# EAGLE board MicroMod_ATP_CarrierBoard-Panel (EAGLE 9.5.2), part 1 of 3
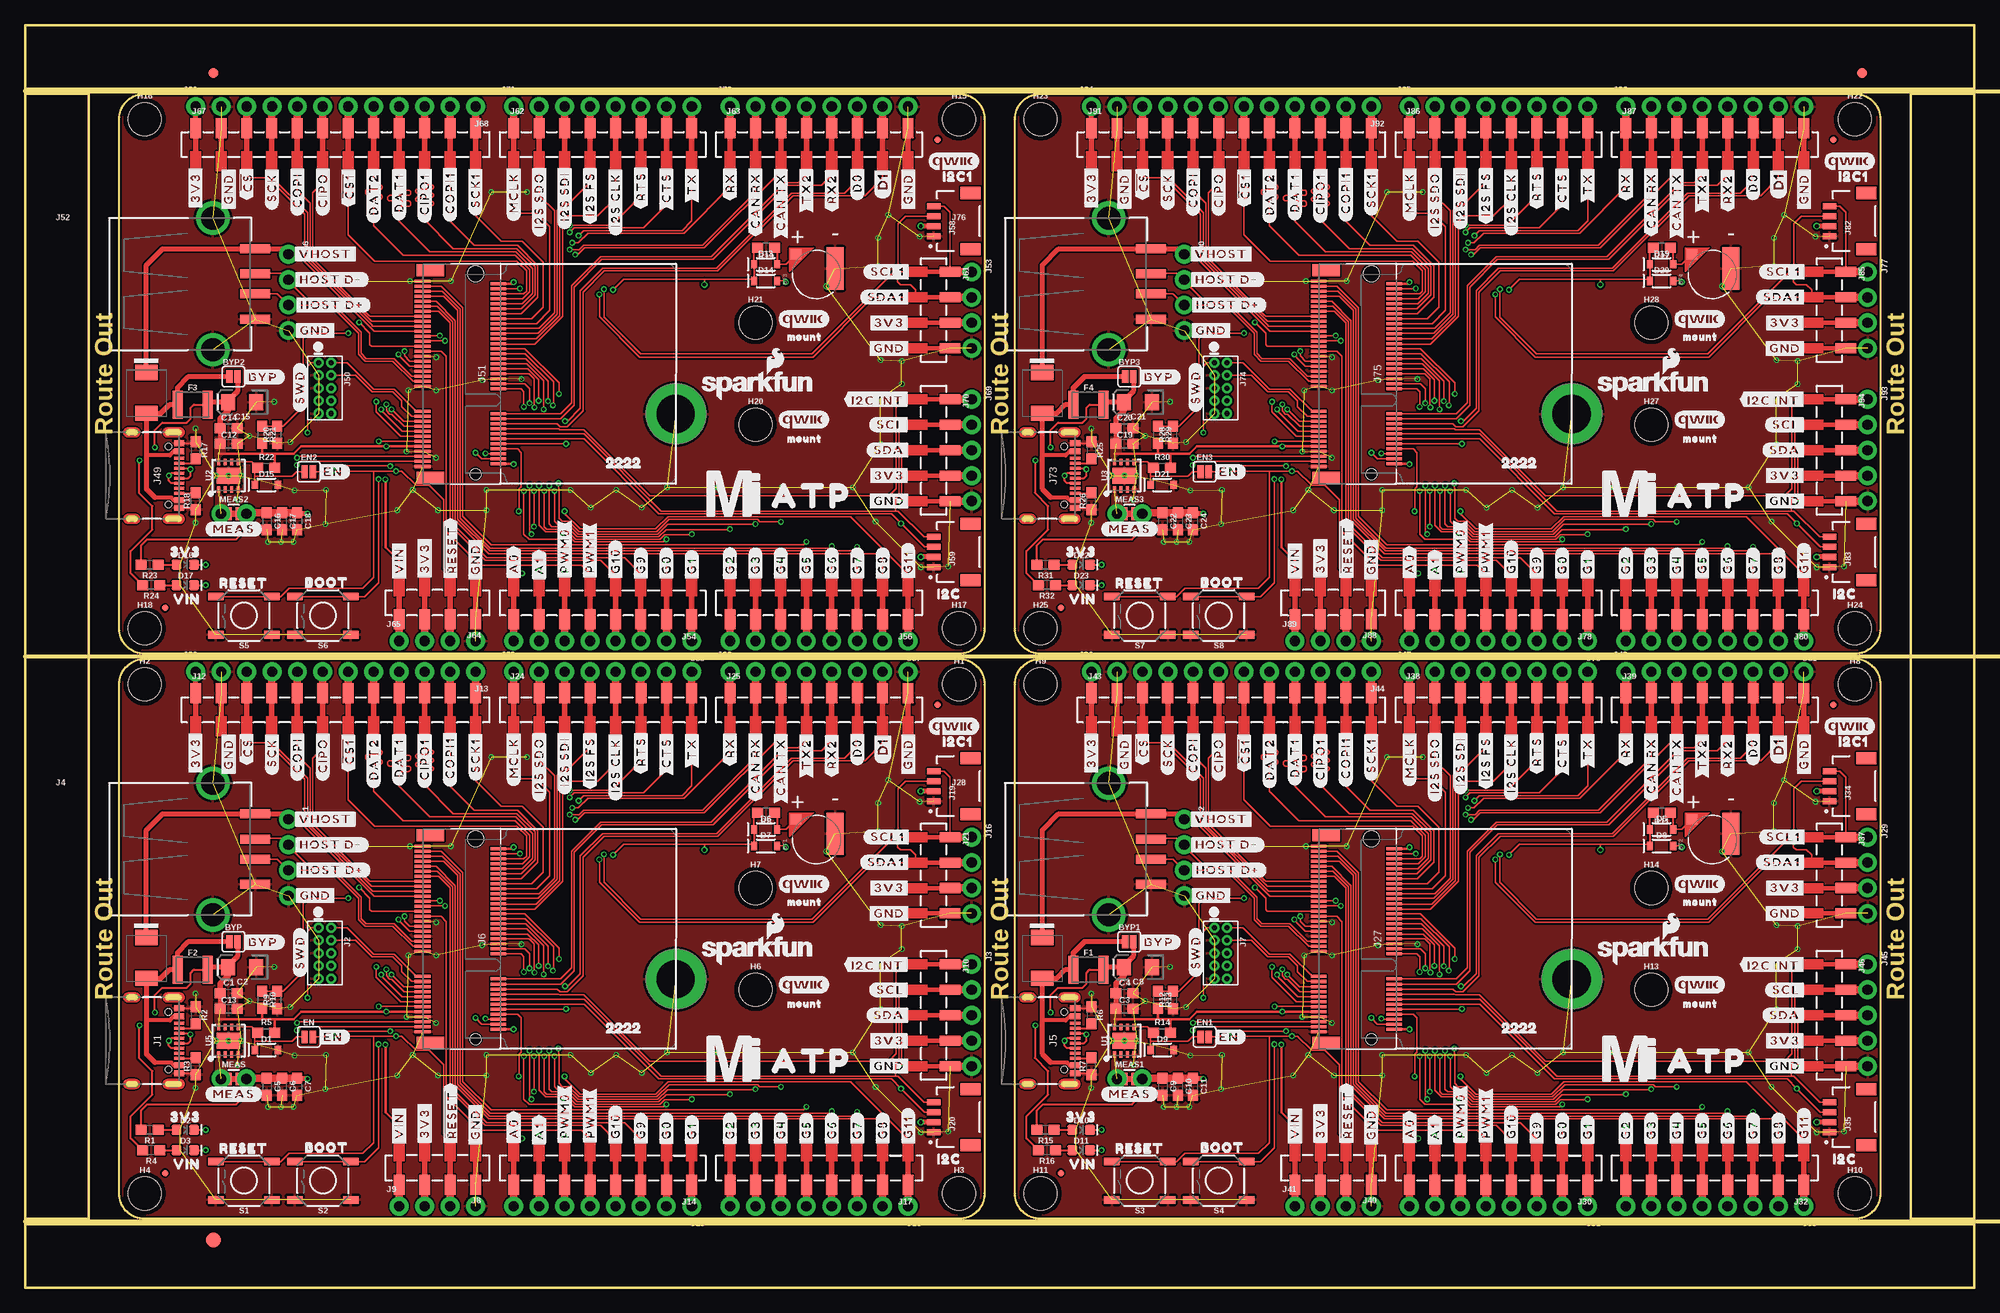
[diagram p0: board, top side]
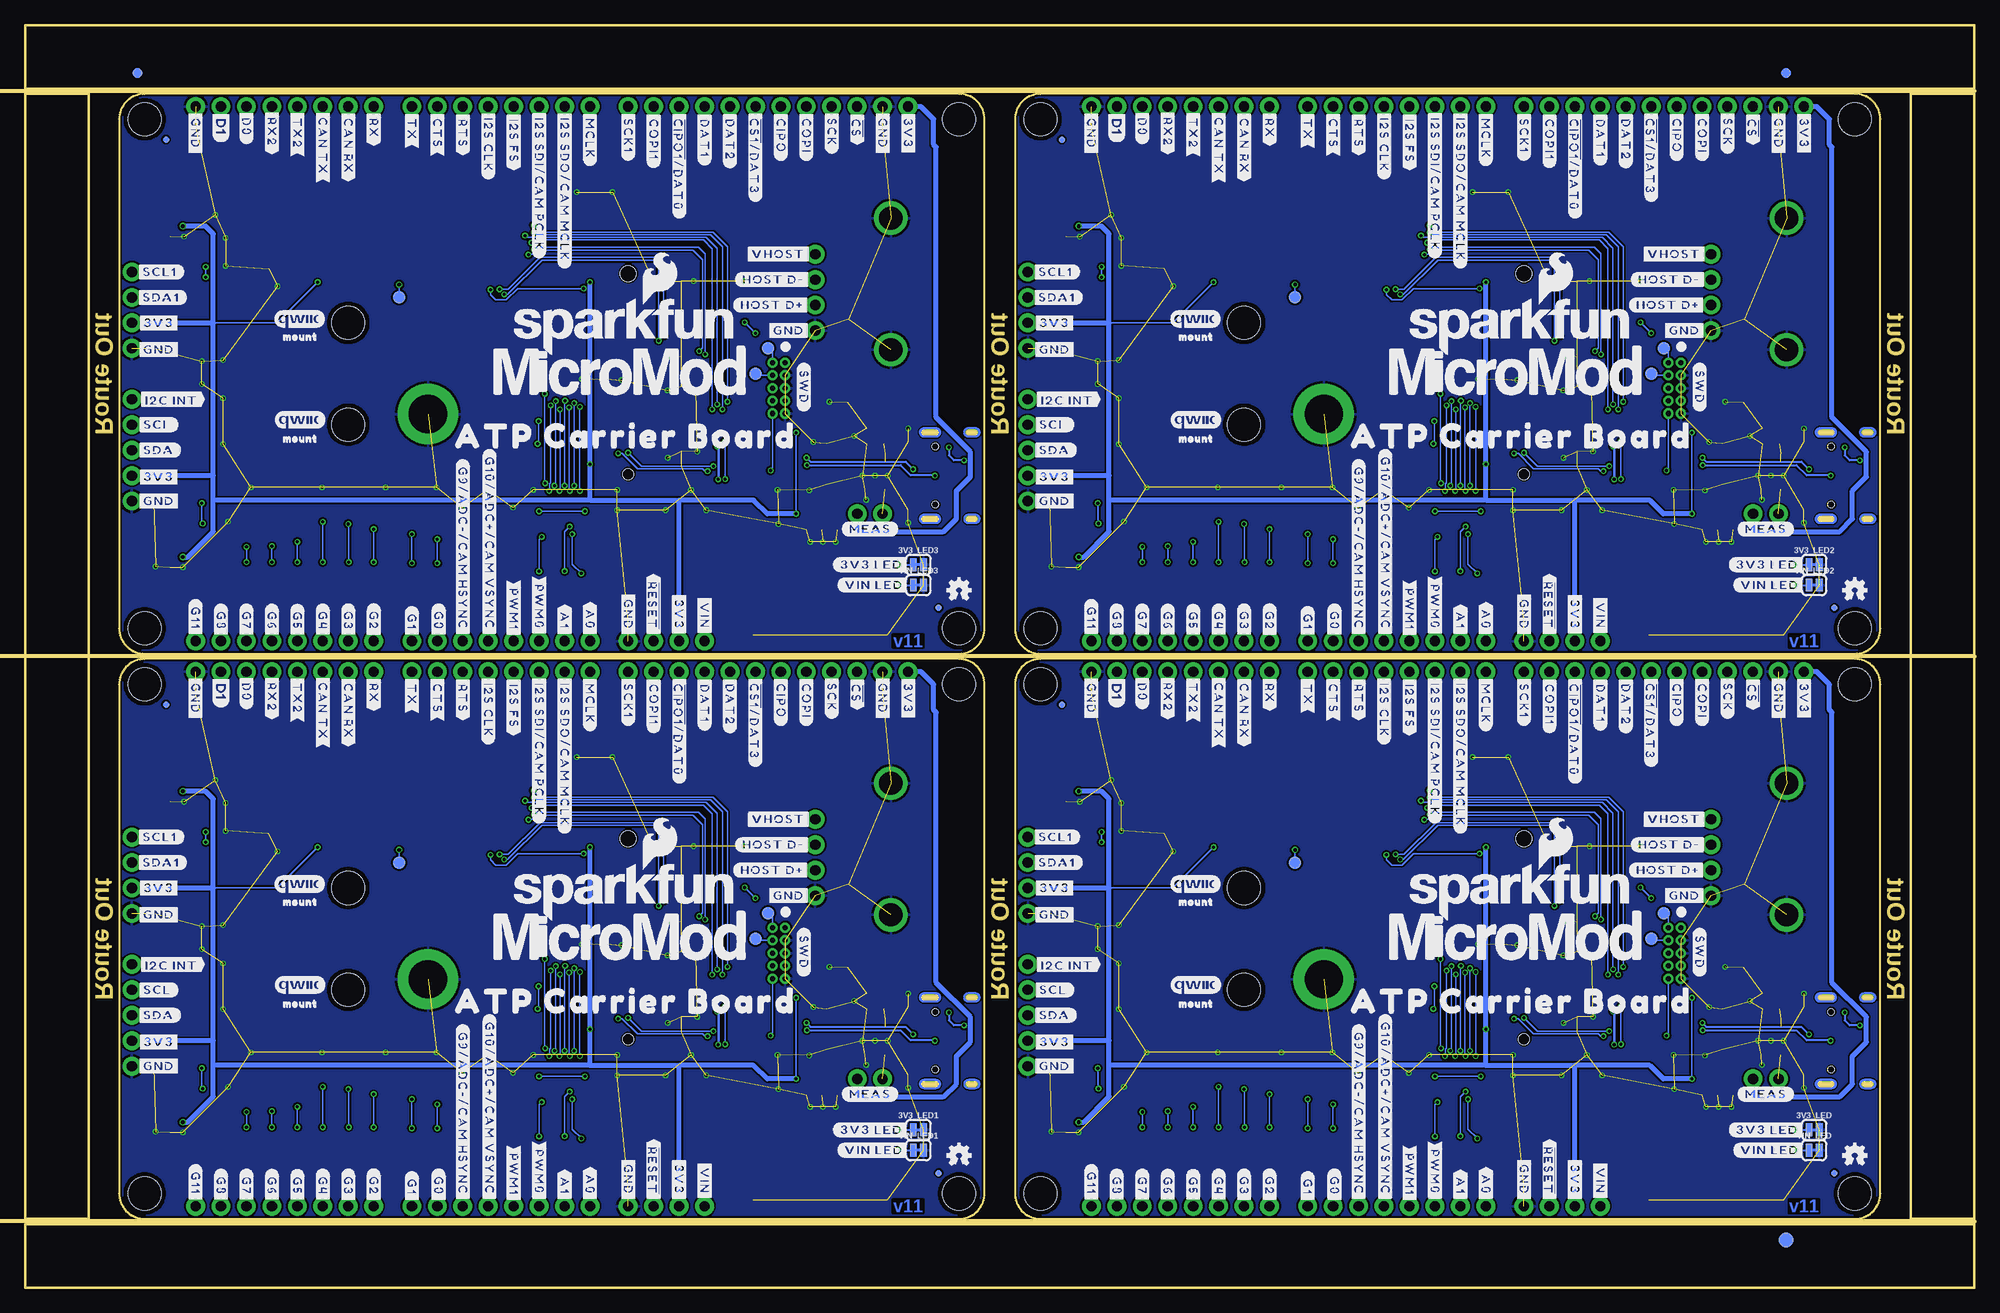
[diagram p1: board, bottom side, seen from below]

Size 194.56 x 125.98 mm. Coordinates in mm from the lower left corner, seen from the top.
Outline: 11.94,62.74 93.22,62.74 arc-90 95.76,60.2 95.76,9.4 arc-90 93.22,6.86 11.94,6.86 arc-90 9.4,9.4 9.4,60.2 arc-90 11.94,62.74
Outline: 101.35,62.74 182.63,62.74 arc-90 185.17,60.2 185.17,9.4 arc-90 182.63,6.86 101.35,6.86 arc-90 98.81,9.4 98.81,60.2 arc-90 101.35,62.74
Outline: 11.94,119.13 93.22,119.13 arc-90 95.76,116.59 95.76,65.79 arc-90 93.22,63.25 11.94,63.25 arc-90 9.4,65.79 9.4,116.59 arc-90 11.94,119.13
Outline: 101.35,119.13 182.63,119.13 arc-90 185.17,116.59 185.17,65.79 arc-90 182.63,63.25 101.35,63.25 arc-90 98.81,65.79 98.81,116.59 arc-90 101.35,119.13
Outline: 0,6.35 194.56,6.35 194.56,0 0,0 0,6.35
Outline: 188.21,119.13 194.56,119.13 194.56,6.86 188.21,6.86 188.21,119.13
Outline: 0,125.98 194.56,125.98 194.56,119.63 0,119.63 0,125.98
Outline: 0,119.13 6.35,119.13 6.35,6.86 0,6.86 0,119.13
Copper layers (1*16): Top 0.035mm / dielectric 1.5mm / Bottom 0.035mm
Design rules "MicroMod_ATP_CarrierBoard": minimum track width 4mil, minimum drill 6mil, track to track 4mil, track to pad 4mil, pad to pad 4mil, via to via 4mil, smd to smd 4mil, copper to edge 4mil, drill to drill 4mil, minimum pad ring 5mil, minimum via ring 5mil, stop-mask expansion 4mil, vias tented up to drill 25mil, thermal gap 10mil
Net classes: 0 default: width 0 mm, drill 0 mm
Milling: 3 lines

## Footprints (pad centres in the part's own frame; a part is rotated, then mirrored left to right if it is on the bottom)
SMT-JUMPER_2_NC_TRACE_SILK = smd 0.66 x 1.27: 1 -0.521,0; 2 0.521,0
ML414H_IV01E = smd 1 x 1: + 2.022,2.032 | smd 4.2 x 1.7: - 0.6,-1.85
SMT-JUMPER_2_NO_SILK = smd 0.635 x 1.27: 1 -0.406,0; 2 0.406,0
0603 = smd 1.1 x 1: 1 -0.85,0; 2 0.85,0
EIA3216 = smd 1.4 x 1.6: + 1.4,0; - -1.4,0
SOD-323 = smd 0.63 x 0.83: A 1.15,0; C -1.15,0
LED-0603 = smd 1 x 1: A -0.877,0; C 0.877,0
DO-214BA = smd 1.52 x 2.21: A -2.032,0; C 2.038,0
FIDUCIAL-1X2 = smd 1 x 1: 1 0,0
FIDUCIAL-1.5X3 = smd 1.5 x 1.5: 1 0,0
1210 = smd 1 x 2.8: 1 -1.5,0; 2 1.5,0
FIDUCIAL-MICRO = smd 0.635 x 0.635: 1 0,0
STAND-OFF = hole 3.302: 0,0
STAND-OFF-REFLOW-M2.5 = drill 3.8 pad 6: 1 0,0
USB-C-16P-2LAYER-PADS = smd 0.3 x 1: A5 -1.25,-0.34; A6 -0.25,-0.34; A7 0.25,-0.34; A8 1.25,-0.34; B5 1.75,-0.34; B6 0.75,-0.34; B7 -0.75,-0.34; B8 -1.75,-0.34 | smd 0.6 x 1: GND -3.225,-0.34; GND2 3.225,-0.34; VBUS1 -2.45,-0.34; VBUS2 2.45,-0.34 | drill 0.4 pad 0.6 long: SHLD1 -4.318,-0.915; SHLD2 4.318,-0.915; SHLD3 -4.318,-5.095; SHLD4 4.318,-5.095 | hole 0.65: -2.89,-1.445; 2.89,-1.445
2X5-PTH-1.27MM = drill 0.508 pad 1: 1 -2.54,-0.635; 2 -2.54,0.635; 3 -1.27,-0.635; 4 -1.27,0.635; 5 0,-0.635; 6 0,0.635; 7 1.27,-0.635; 8 1.27,0.635; 9 2.54,-0.635; 10 2.54,0.635
1X05_NO_SILK = drill 1.016 pad 1.88: 1 0,0; 2 2.54,0; 3 5.08,0; 4 7.62,0; 5 10.16,0
USB-A-S-SILK-FEMALE = smd 3 x 0.9: D+ 7.212,-1; D- 7.212,1; GND 7.212,-3.5; VBUS 7.212,3.5 | drill 2.311: SHLD1 3,-6.566; SHLD2 3,6.566
M.2-CONNECTOR-E = smd 0.3 x 1.55: 1 9.25,-5.275; 2 9,2.275; 3 8.75,-5.275; 4 8.5,2.275; 5 8.25,-5.275; 6 8,2.275; 7 7.75,-5.275; 8 7.5,2.275; 9 7.25,-5.275; 10 7,2.275; 11 6.75,-5.275; 12 6.5,2.275; 13 6.25,-5.275; 14 6,2.275; 15 5.75,-5.275; 16 5.5,2.275; 17 5.25,-5.275; 18 5,2.275; 19 4.75,-5.275; 20 4.5,2.275; 21 4.25,-5.275; 22 4,2.275; 23 3.75,-5.275; 32 1.5,2.275; 33 1.25,-5.275; 34 1,2.275; 35 0.75,-5.275; 36 0.5,2.275; 37 0.25,-5.275; 38 0,2.275; 39 -0.25,-5.275; 40 -0.5,2.275; 41 -0.75,-5.275; 42 -1,2.275; 43 -1.25,-5.275; 44 -1.5,2.275; 45 -1.75,-5.275; 46 -2,2.275; 47 -2.25,-5.275; 48 -2.5,2.275; 49 -2.75,-5.275; 50 -3,2.275; 51 -3.25,-5.275; 52 -3.5,2.275; 53 -3.75,-5.275; 54 -4,2.275; 55 -4.25,-5.275; 56 -4.5,2.275; 57 -4.75,-5.275; 58 -5,2.275; 59 -5.25,-5.275; 60 -5.5,2.275; 61 -5.75,-5.275; 62 -6,2.275; 63 -6.25,-5.275; 64 -6.5,2.275; 65 -6.75,-5.275; 66 -7,2.275; 67 -7.25,-5.275; 68 -7.5,2.275; 69 -7.75,-5.275; 70 -8,2.275; 71 -8.25,-5.275; 72 -8.5,2.275; 73 -8.75,-5.275; 74 -9,2.275; 75 -9.25,-5.275 | smd 1.2 x 2.75: A1 10.35,-4.5; A2 -10.35,-4.5 | hole 1.1: 10,0 | hole 1.6: -10,0
1X04_SMD_VERTICAL_COMBO = smd 1 x 2: 1 0,1.65; 2 2.54,1.65; 3 5.08,1.65; 4 7.62,1.652
1X04_NO_SILK = drill 1.016 pad 1.88: 1 0,0; 2 2.54,0; 3 5.08,0; 4 7.62,0
1X05_SMD_VERTICAL_COMBO = smd 1 x 2: 1 0,1.65; 2 2.54,1.65; 3 5.08,1.65; 4 7.62,1.652; 5 10.16,1.65
1X12_SMD_COMBINED = smd 1 x 2: 1 0,1.65; 2 2.54,1.65; 3 5.08,1.65; 4 7.62,1.652; 5 10.16,1.65; 6 12.7,1.652; 7 15.24,1.65; 8 17.78,1.652; 9 20.32,1.65; 10 22.86,1.652; 11 25.4,1.65; 12 27.94,1.652
1X08_NO_SILK = drill 1.016 pad 1.88: 1 0,0; 2 2.54,0; 3 5.08,0; 4 7.62,0; 5 10.16,0; 6 12.7,0; 7 15.24,0; 8 17.78,0
1X08_SMD_COMBINED = smd 1 x 2: 1 0,1.65; 2 2.54,1.65; 3 5.08,1.65; 4 7.62,1.652; 5 10.16,1.65; 6 12.7,1.652; 7 15.24,1.65; 8 17.78,1.652
JST04_1MM_RA = smd 0.6 x 1.35: 1 -1.5,0; 2 -0.5,0; 3 0.5,0; 4 1.5,0 | smd 1.2 x 2: NC1 2.8,-3.675; NC2 -2.8,-3.675
COMBO-JUMPER_2_NC_TRACE = smd 0.635 x 1.27: 1 -0.508,0; 2 0.508,0 | drill 1.016 pad 1.88: 3 -1.27,0; 4 1.27,0
TACTILE_SWITCH_SMD_5.2MM = smd 1.524 x 0.762: 1 -2.794,1.905; 2 2.794,1.905; 3 -2.794,-1.905; 4 2.794,-1.905
PAD.03X.05 = smd 1.27 x 1.27: P$1 0,0
UDFN-8 = smd 0.3 x 0.65: 1 -0.975,-1.375; 2 -0.325,-1.375; 3 0.325,-1.375; 4 0.975,-1.375; 5 0.975,1.375; 6 0.325,1.375; 7 -0.325,1.375; 8 -0.975,1.375 | smd 2.35 x 1.6: EP 0,0

## Placement (x,y rotation side)
3V3_LED  JUMPER-SMT_2_NC_TRACE_SILK  [SMT-JUMPER_2_NC_TRACE_SILK]  16,15.75 0 bottom
3V3_LED1  JUMPER-SMT_2_NC_TRACE_SILK  [SMT-JUMPER_2_NC_TRACE_SILK]  105.41,15.75 0 bottom
3V3_LED2  JUMPER-SMT_2_NC_TRACE_SILK  [SMT-JUMPER_2_NC_TRACE_SILK]  16,72.14 0 bottom
3V3_LED3  JUMPER-SMT_2_NC_TRACE_SILK  [SMT-JUMPER_2_NC_TRACE_SILK]  105.41,72.14 0 bottom
BT1  ML414H  [ML414H_IV01E]  78.99,44.7 90 top
BT2  ML414H  [ML414H_IV01E]  168.4,44.7 90 top
BT3  ML414H  [ML414H_IV01E]  78.99,101.09 90 top
BT4  ML414H  [ML414H_IV01E]  168.4,101.09 90 top
BYP  JUMPER-SMT_2_NO_SILK  [SMT-JUMPER_2_NO_SILK]  20.8,34.52 0 top
BYP1  JUMPER-SMT_2_NO_SILK  [SMT-JUMPER_2_NO_SILK]  110.21,34.52 0 top
BYP2  JUMPER-SMT_2_NO_SILK  [SMT-JUMPER_2_NO_SILK]  20.8,90.91 0 top
BYP3  JUMPER-SMT_2_NO_SILK  [SMT-JUMPER_2_NO_SILK]  110.21,90.91 0 top
C1  0.1uF  [0603]  20.32,29.36 0 top
C2  10uF  [EIA3216]  21.67,31.98 180 top
C3  0.22uF  [0603]  109.73,27.84 0 top
C4  0.1uF  [0603]  109.73,29.36 0 top
C5  1.0uF  [0603]  24.13,20.07 270 top
C6  0.1uF  [0603]  25.65,20.07 270 top
C7  0.22uF  [0603]  27.18,20.07 270 top
C8  10uF  [EIA3216]  111.07,31.98 180 top
C9  1.0uF  [0603]  113.54,20.07 270 top
C10  0.1uF  [0603]  115.06,20.07 270 top
C11  0.22uF  [0603]  116.59,20.07 270 top
C12  0.22uF  [0603]  20.32,84.23 0 top
C13  0.22uF  [0603]  20.32,27.84 0 top
C14  0.1uF  [0603]  20.32,85.75 0 top
C15  10uF  [EIA3216]  21.67,88.37 180 top
C16  1.0uF  [0603]  24.13,76.45 270 top
C17  0.1uF  [0603]  25.65,76.45 270 top
C18  0.22uF  [0603]  27.18,76.45 270 top
C19  0.22uF  [0603]  109.73,84.23 0 top
C20  0.1uF  [0603]  109.73,85.75 0 top
C21  10uF  [EIA3216]  111.07,88.37 180 top
C22  1.0uF  [0603]  113.54,76.45 270 top
C23  0.1uF  [0603]  115.06,76.45 270 top
C24  0.22uF  [0603]  116.59,76.45 270 top
D1  3.3V  [SOD-323]  24.08,23.72 0 top
D2  RED  [LED-0603]  16,15.75 0 top
D3  RED  [LED-0603]  16,13.72 0 top
D4  1A/15V/220mV  [DO-214BA]  12.12,32.89 90 top
D5  3A/10V/280mV  [SOD-323]  163.32,45.72 0 top
D6  3A/10V/280mV  [SOD-323]  73.91,45.72 0 top
D7  1A/23V/620mV  [SOD-323]  73.91,44.07 0 top
D8  1A/23V/620mV  [SOD-323]  163.32,44.07 0 top
D9  3.3V  [SOD-323]  113.49,23.72 0 top
D10  RED  [LED-0603]  105.41,15.75 0 top
D11  RED  [LED-0603]  105.41,13.72 0 top
D12  1A/15V/220mV  [DO-214BA]  101.52,32.89 90 top
D13  3A/10V/280mV  [SOD-323]  73.91,102.11 0 top
D14  1A/23V/620mV  [SOD-323]  73.91,100.46 0 top
D15  3.3V  [SOD-323]  24.08,80.11 0 top
D16  RED  [LED-0603]  16,72.14 0 top
D17  RED  [LED-0603]  16,70.1 0 top
D18  1A/15V/220mV  [DO-214BA]  12.12,89.28 90 top
D19  3A/10V/280mV  [SOD-323]  163.32,102.11 0 top
D20  1A/23V/620mV  [SOD-323]  163.32,100.46 0 top
D21  3.3V  [SOD-323]  113.49,80.11 0 top
D22  RED  [LED-0603]  105.41,72.14 0 top
D23  RED  [LED-0603]  105.41,70.1 0 top
D24  1A/15V/220mV  [DO-214BA]  101.52,89.28 90 top
E$1  [FIDUCIAL-1X2]  18.8,121.22 0 top
E$2  [FIDUCIAL-1X2]  18.8,121.22 0 bottom
E$3  [FIDUCIAL-1X2]  183.32,121.22 0 top
E$4  [FIDUCIAL-1X2]  183.32,121.22 0 bottom
E$5  [FIDUCIAL-1.5X3]  18.8,4.76 0 top
E$6  [FIDUCIAL-1.5X3]  18.8,4.76 0 bottom
EN  JUMPER-SMT_2_NO_SILK  [SMT-JUMPER_2_NO_SILK]  28.32,25.02 0 top
EN1  JUMPER-SMT_2_NO_SILK  [SMT-JUMPER_2_NO_SILK]  117.73,25.02 0 top
EN2  JUMPER-SMT_2_NO_SILK  [SMT-JUMPER_2_NO_SILK]  28.32,81.41 0 top
EN3  JUMPER-SMT_2_NO_SILK  [SMT-JUMPER_2_NO_SILK]  117.73,81.41 0 top
F1  6V/2A  [1210]  106.12,31.72 0 top
F2  6V/2A  [1210]  16.71,31.72 0 top
F3  6V/2A  [1210]  16.71,88.11 0 top
F4  6V/2A  [1210]  106.12,88.11 0 top
FD1  FIDUCIALUFIDUCIAL  [FIDUCIAL-MICRO]  13.97,11.43 0 top
FD2  FIDUCIALUFIDUCIAL  [FIDUCIAL-MICRO]  91.08,58.17 0 top
FD3  FIDUCIALUFIDUCIAL  [FIDUCIAL-MICRO]  13.97,11.43 0 bottom
FD4  FIDUCIALUFIDUCIAL  [FIDUCIAL-MICRO]  91.08,58.17 0 bottom
FD5  FIDUCIALUFIDUCIAL  [FIDUCIAL-MICRO]  103.38,11.43 0 top
FD6  FIDUCIALUFIDUCIAL  [FIDUCIAL-MICRO]  180.48,58.17 0 top
FD7  FIDUCIALUFIDUCIAL  [FIDUCIAL-MICRO]  103.38,11.43 0 bottom
FD8  FIDUCIALUFIDUCIAL  [FIDUCIAL-MICRO]  180.48,58.17 0 bottom
FD9  FIDUCIALUFIDUCIAL  [FIDUCIAL-MICRO]  13.97,67.82 0 top
FD10  FIDUCIALUFIDUCIAL  [FIDUCIAL-MICRO]  91.08,114.55 0 top
FD11  FIDUCIALUFIDUCIAL  [FIDUCIAL-MICRO]  13.97,67.82 0 bottom
FD12  FIDUCIALUFIDUCIAL  [FIDUCIAL-MICRO]  91.08,114.55 0 bottom
FD13  FIDUCIALUFIDUCIAL  [FIDUCIAL-MICRO]  103.38,67.82 0 top
FD14  FIDUCIALUFIDUCIAL  [FIDUCIAL-MICRO]  180.48,114.55 0 top
FD15  FIDUCIALUFIDUCIAL  [FIDUCIAL-MICRO]  103.38,67.82 0 bottom
FD16  FIDUCIALUFIDUCIAL  [FIDUCIAL-MICRO]  180.48,114.55 0 bottom
H1  STAND-OFF  [STAND-OFF]  93.22,60.2 0 top
H2  STAND-OFF  [STAND-OFF]  11.94,60.2 0 top
H3  STAND-OFF  [STAND-OFF]  93.22,9.4 0 top
H4  STAND-OFF  [STAND-OFF]  11.94,9.4 0 top
H5  STAND-OFF-REFLOW2.5MM_TALL  [STAND-OFF-REFLOW-M2.5]  64.95,30.78 0 top
H6  STAND-OFF  [STAND-OFF]  72.9,29.72 0 top
H7  STAND-OFF  [STAND-OFF]  72.9,39.88 0 top
H8  STAND-OFF  [STAND-OFF]  182.63,60.2 0 top
H9  STAND-OFF  [STAND-OFF]  101.35,60.2 0 top
H10  STAND-OFF  [STAND-OFF]  182.63,9.4 0 top
H11  STAND-OFF  [STAND-OFF]  101.35,9.4 0 top
H12  STAND-OFF-REFLOW2.5MM_TALL  [STAND-OFF-REFLOW-M2.5]  154.36,30.78 0 top
H13  STAND-OFF  [STAND-OFF]  162.31,29.72 0 top
H14  STAND-OFF  [STAND-OFF]  162.31,39.88 0 top
H15  STAND-OFF  [STAND-OFF]  93.22,116.59 0 top
H16  STAND-OFF  [STAND-OFF]  11.94,116.59 0 top
H17  STAND-OFF  [STAND-OFF]  93.22,65.79 0 top
H18  STAND-OFF  [STAND-OFF]  11.94,65.79 0 top
H19  STAND-OFF-REFLOW2.5MM_TALL  [STAND-OFF-REFLOW-M2.5]  64.95,87.17 0 top
H20  STAND-OFF  [STAND-OFF]  72.9,86.11 0 top
H21  STAND-OFF  [STAND-OFF]  72.9,96.27 0 top
H22  STAND-OFF  [STAND-OFF]  182.63,116.59 0 top
H23  STAND-OFF  [STAND-OFF]  101.35,116.59 0 top
H24  STAND-OFF  [STAND-OFF]  182.63,65.79 0 top
H25  STAND-OFF  [STAND-OFF]  101.35,65.79 0 top
H26  STAND-OFF-REFLOW2.5MM_TALL  [STAND-OFF-REFLOW-M2.5]  154.36,87.17 0 top
H27  STAND-OFF  [STAND-OFF]  162.31,86.11 0 top
H28  STAND-OFF  [STAND-OFF]  162.31,96.27 0 top
J1  [USB-C-16P-2LAYER-PADS]  15.75,24.64 270 top
J2  JTAG  [2X5-PTH-1.27MM]  29.92,33.38 270 top
J3  [1X05_NO_SILK]  94.49,32.26 270 top
J4  USB_A_SMT_FEMALE  [USB-A-S-SILK-FEMALE]  15.75,43.76 0 top
J5  [USB-C-16P-2LAYER-PADS]  105.16,24.64 270 top
J6  MICROMOD-2222-C  [M.2-CONNECTOR-E]  44.96,34.8 270 top
J7  JTAG  [2X5-PTH-1.27MM]  119.33,33.38 270 top
J8  1X04_SMD_STRAIGHT_COMBO  [1X04_SMD_VERTICAL_COMBO]  44.96,11.94 180 top
J9  [1X04_NO_SILK]  37.34,8.13 0 top
J10  [1X05_SMD_VERTICAL_COMBO]  90.68,32.26 270 top
J11  [1X04_NO_SILK]  26.29,46.74 270 top
J12  [1X12_SMD_COMBINED]  17.02,57.66 0 top
J13  [1X08_NO_SILK]  44.96,61.47 180 top
J14  [1X08_SMD_COMBINED]  66.55,11.94 180 top
J15  [1X08_NO_SILK]  66.55,8.13 180 top
J16  [1X04_NO_SILK]  94.49,44.96 270 top
J17  [1X08_SMD_COMBINED]  88.14,11.94 180 top
J18  [1X08_NO_SILK]  88.14,8.13 180 top
J19  QWIIC_RIGHT_ANGLE  [JST04_1MM_RA]  90.68,50.04 90 top
J20  QWIIC_RIGHT_ANGLE  [JST04_1MM_RA]  90.68,17.02 90 top
J21  1X04_SMD_STRAIGHT_COMBO  [1X04_SMD_VERTICAL_COMBO]  90.68,44.96 270 top
J22  [1X04_NO_SILK]  17.03,61.47 0 top
J23  [1X08_NO_SILK]  48.77,61.47 0 top
J24  [1X08_SMD_COMBINED]  48.77,57.66 0 top
J25  [1X08_SMD_COMBINED]  70.36,57.66 0 top
J26  [1X08_NO_SILK]  70.36,61.47 0 top
J27  MICROMOD-2222-C  [M.2-CONNECTOR-E]  134.37,34.8 270 top
J28  USB_A_SMT_FEMALE  [USB-A-S-SILK-FEMALE]  105.16,43.76 0 top
J29  [1X04_NO_SILK]  183.9,44.96 270 top
J30  [1X08_SMD_COMBINED]  155.96,11.94 180 top
J31  [1X08_NO_SILK]  155.96,8.13 180 top
J32  [1X08_SMD_COMBINED]  177.55,11.94 180 top
J33  [1X08_NO_SILK]  177.55,8.13 180 top
J34  QWIIC_RIGHT_ANGLE  [JST04_1MM_RA]  180.09,50.04 90 top
J35  QWIIC_RIGHT_ANGLE  [JST04_1MM_RA]  180.09,17.02 90 top
J36  [1X04_NO_SILK]  106.44,61.47 0 top
J37  1X04_SMD_STRAIGHT_COMBO  [1X04_SMD_VERTICAL_COMBO]  180.09,44.96 270 top
J38  [1X08_SMD_COMBINED]  138.18,57.66 0 top
J39  [1X08_SMD_COMBINED]  159.77,57.66 0 top
J40  1X04_SMD_STRAIGHT_COMBO  [1X04_SMD_VERTICAL_COMBO]  134.37,11.94 180 top
J41  [1X04_NO_SILK]  126.75,8.13 0 top
J42  [1X04_NO_SILK]  115.7,46.74 270 top
J43  [1X12_SMD_COMBINED]  106.43,57.66 0 top
J44  [1X08_NO_SILK]  134.37,61.47 180 top
J45  [1X05_NO_SILK]  183.9,32.26 270 top
J46  [1X05_SMD_VERTICAL_COMBO]  180.09,32.26 270 top
J47  [1X08_NO_SILK]  138.18,61.47 0 top
J48  [1X08_NO_SILK]  159.77,61.47 0 top
J49  [USB-C-16P-2LAYER-PADS]  15.75,81.03 270 top
J50  JTAG  [2X5-PTH-1.27MM]  29.92,89.76 270 top
J51  MICROMOD-2222-C  [M.2-CONNECTOR-E]  44.96,91.19 270 top
J52  USB_A_SMT_FEMALE  [USB-A-S-SILK-FEMALE]  15.75,100.15 0 top
J53  [1X04_NO_SILK]  94.49,101.35 270 top
J54  [1X08_SMD_COMBINED]  66.55,68.33 180 top
J55  [1X08_NO_SILK]  66.55,64.52 180 top
J56  [1X08_SMD_COMBINED]  88.14,68.33 180 top
J57  [1X08_NO_SILK]  88.14,64.52 180 top
J58  QWIIC_RIGHT_ANGLE  [JST04_1MM_RA]  90.68,106.43 90 top
J59  QWIIC_RIGHT_ANGLE  [JST04_1MM_RA]  90.68,73.41 90 top
J60  [1X04_NO_SILK]  17.03,117.86 0 top
J61  1X04_SMD_STRAIGHT_COMBO  [1X04_SMD_VERTICAL_COMBO]  90.68,101.35 270 top
J62  [1X08_SMD_COMBINED]  48.77,114.05 0 top
J63  [1X08_SMD_COMBINED]  70.36,114.05 0 top
J64  1X04_SMD_STRAIGHT_COMBO  [1X04_SMD_VERTICAL_COMBO]  44.96,68.33 180 top
J65  [1X04_NO_SILK]  37.34,64.52 0 top
J66  [1X04_NO_SILK]  26.29,103.12 270 top
J67  [1X12_SMD_COMBINED]  17.02,114.05 0 top
J68  [1X08_NO_SILK]  44.96,117.86 180 top
J69  [1X05_NO_SILK]  94.49,88.65 270 top
J70  [1X05_SMD_VERTICAL_COMBO]  90.68,88.65 270 top
J71  [1X08_NO_SILK]  48.77,117.86 0 top
J72  [1X08_NO_SILK]  70.36,117.86 0 top
J73  [USB-C-16P-2LAYER-PADS]  105.16,81.03 270 top
J74  JTAG  [2X5-PTH-1.27MM]  119.33,89.76 270 top
J75  MICROMOD-2222-C  [M.2-CONNECTOR-E]  134.37,91.19 270 top
J76  USB_A_SMT_FEMALE  [USB-A-S-SILK-FEMALE]  105.16,100.15 0 top
J77  [1X04_NO_SILK]  183.9,101.35 270 top
J78  [1X08_SMD_COMBINED]  155.96,68.33 180 top
J79  [1X08_NO_SILK]  155.96,64.52 180 top
J80  [1X08_SMD_COMBINED]  177.55,68.33 180 top
J81  [1X08_NO_SILK]  177.55,64.52 180 top
J82  QWIIC_RIGHT_ANGLE  [JST04_1MM_RA]  180.09,106.43 90 top
J83  QWIIC_RIGHT_ANGLE  [JST04_1MM_RA]  180.09,73.41 90 top
J84  [1X04_NO_SILK]  106.44,117.86 0 top
J85  1X04_SMD_STRAIGHT_COMBO  [1X04_SMD_VERTICAL_COMBO]  180.09,101.35 270 top
J86  [1X08_SMD_COMBINED]  138.18,114.05 0 top
J87  [1X08_SMD_COMBINED]  159.77,114.05 0 top
J88  1X04_SMD_STRAIGHT_COMBO  [1X04_SMD_VERTICAL_COMBO]  134.37,68.33 180 top
J89  [1X04_NO_SILK]  126.75,64.52 0 top
J90  [1X04_NO_SILK]  115.7,103.12 270 top
J91  [1X12_SMD_COMBINED]  106.43,114.05 0 top
J92  [1X08_NO_SILK]  134.37,117.86 180 top
J93  [1X05_NO_SILK]  183.9,88.65 270 top
J94  [1X05_SMD_VERTICAL_COMBO]  180.09,88.65 270 top
J95  [1X08_NO_SILK]  138.18,117.86 0 top
J96  [1X08_NO_SILK]  159.77,117.86 0 top
LOGO1  SFE_LOGO_NAME_FLAME.1_INCH  [SFE_LOGO_NAME_FLAME_.1]  73.15,33.66 0 top
LOGO2  QWIIC_LOGO_5MM  [QWIIC_5MM]  77.72,30.23 0 bottom
LOGO3  OSHW-LOGOMINI  [OSHW-LOGO-MINI]  11.94,13.21 0 bottom
LOGO4  SFE_LOGO_NAME_FLAME.2_INCH  [SFE_LOGO_NAME_FLAME_.2]  45.34,39.5 0 bottom
LOGO5  QWIIC_LOGO_3MM  [QWIIC_5MM]  77.71,40.28 0 top
LOGO6  QWIIC_LOGO_3MM  [QWIIC_5MM]  77.71,30.25 0 top
LOGO7  QWIIC_LOGO_3MM  [QWIIC_5MM]  92.68,56.03 0 top
LOGO8  QWIIC_LOGO_3MM  [QWIIC_5MM]  77.76,40.28 0 bottom
LOGO9  OSHW-LOGOMINI  [OSHW-LOGO-MINI]  101.35,13.21 0 bottom
LOGO10  SFE_LOGO_NAME_FLAME.2_INCH  [SFE_LOGO_NAME_FLAME_.2]  134.75,39.5 0 bottom
LOGO11  SFE_LOGO_NAME_FLAME.1_INCH  [SFE_LOGO_NAME_FLAME_.1]  162.56,33.66 0 top
LOGO12  QWIIC_LOGO_3MM  [QWIIC_5MM]  167.12,40.28 0 top
LOGO13  QWIIC_LOGO_3MM  [QWIIC_5MM]  167.12,30.25 0 top
LOGO14  QWIIC_LOGO_3MM  [QWIIC_5MM]  167.17,40.28 0 bottom
LOGO15  QWIIC_LOGO_5MM  [QWIIC_5MM]  167.13,30.23 0 bottom
LOGO16  QWIIC_LOGO_3MM  [QWIIC_5MM]  182.08,56.03 0 top
LOGO17  OSHW-LOGOMINI  [OSHW-LOGO-MINI]  11.94,69.6 0 bottom
LOGO18  SFE_LOGO_NAME_FLAME.2_INCH  [SFE_LOGO_NAME_FLAME_.2]  45.34,95.89 0 bottom
LOGO19  SFE_LOGO_NAME_FLAME.1_INCH  [SFE_LOGO_NAME_FLAME_.1]  73.15,90.04 0 top
LOGO20  QWIIC_LOGO_3MM  [QWIIC_5MM]  77.71,96.67 0 top
LOGO21  QWIIC_LOGO_3MM  [QWIIC_5MM]  77.71,86.64 0 top
LOGO22  QWIIC_LOGO_3MM  [QWIIC_5MM]  77.76,96.67 0 bottom
LOGO23  QWIIC_LOGO_5MM  [QWIIC_5MM]  77.72,86.61 0 bottom
LOGO24  QWIIC_LOGO_3MM  [QWIIC_5MM]  92.68,112.42 0 top
LOGO25  OSHW-LOGOMINI  [OSHW-LOGO-MINI]  101.35,69.6 0 bottom
LOGO26  SFE_LOGO_NAME_FLAME.2_INCH  [SFE_LOGO_NAME_FLAME_.2]  134.75,95.89 0 bottom
LOGO27  SFE_LOGO_NAME_FLAME.1_INCH  [SFE_LOGO_NAME_FLAME_.1]  162.56,90.04 0 top
LOGO28  QWIIC_LOGO_3MM  [QWIIC_5MM]  167.12,96.67 0 top
LOGO29  QWIIC_LOGO_3MM  [QWIIC_5MM]  167.12,86.64 0 top
LOGO30  QWIIC_LOGO_3MM  [QWIIC_5MM]  167.17,96.67 0 bottom
LOGO31  QWIIC_LOGO_5MM  [QWIIC_5MM]  167.13,86.61 0 bottom
LOGO32  QWIIC_LOGO_3MM  [QWIIC_5MM]  182.08,112.42 0 top
MEAS  [COMBO-JUMPER_2_NC_TRACE]  20.83,20.83 0 top
MEAS1  [COMBO-JUMPER_2_NC_TRACE]  110.24,20.83 0 top
MEAS2  [COMBO-JUMPER_2_NC_TRACE]  20.83,77.22 0 top
MEAS3  [COMBO-JUMPER_2_NC_TRACE]  110.24,77.22 0 top
R1  1k  [0603]  12.45,15.75 180 top
R2  5.1k  [0603]  17.02,27.18 270 top
R3  5.1k  [0603]  17.02,22.1 90 top
R4  1k  [0603]  12.57,13.72 180 top
R5  100k  [0603]  24.08,25.43 0 top
R6  5.1k  [0603]  106.43,27.18 270 top
R7  5.1k  [0603]  106.43,22.1 90 top
R8  1k  [0603]  73.94,47.4 180 top
R9  10k  [0603]  25.15,28.7 90 top
R10  20k  [0603]  23.65,28.73 270 top
R11  1k  [0603]  163.35,47.4 180 top
R12  10k  [0603]  114.55,28.7 90 top
R13  20k  [0603]  113.06,28.73 270 top
R14  100k  [0603]  113.49,25.43 0 top
R15  1k  [0603]  101.85,15.75 180 top
R16  1k  [0603]  101.98,13.72 180 top
R17  5.1k  [0603]  17.02,83.57 270 top
R18  5.1k  [0603]  17.02,78.49 90 top
R19  1k  [0603]  73.94,103.78 180 top
R20  10k  [0603]  25.15,85.09 90 top
R21  20k  [0603]  23.65,85.12 270 top
R22  100k  [0603]  24.08,81.81 0 top
R23  1k  [0603]  12.45,72.14 180 top
R24  1k  [0603]  12.57,70.1 180 top
R25  5.1k  [0603]  106.43,83.57 270 top
R26  5.1k  [0603]  106.43,78.49 90 top
R27  1k  [0603]  163.35,103.78 180 top
R28  10k  [0603]  114.55,85.09 90 top
R29  20k  [0603]  113.06,85.12 270 top
R30  100k  [0603]  113.49,81.81 0 top
R31  1k  [0603]  101.85,72.14 180 top
R32  1k  [0603]  101.98,70.1 180 top
S1  Reset  [TACTILE_SWITCH_SMD_5.2MM]  21.84,10.67 180 top
S2  BOOT  [TACTILE_SWITCH_SMD_5.2MM]  29.72,10.67 180 top
S3  Reset  [TACTILE_SWITCH_SMD_5.2MM]  111.25,10.67 180 top
S4  BOOT  [TACTILE_SWITCH_SMD_5.2MM]  119.13,10.67 180 top
S5  Reset  [TACTILE_SWITCH_SMD_5.2MM]  21.84,67.06 180 top
S6  BOOT  [TACTILE_SWITCH_SMD_5.2MM]  29.72,67.06 180 top
S7  Reset  [TACTILE_SWITCH_SMD_5.2MM]  111.25,67.06 180 top
S8  BOOT  [TACTILE_SWITCH_SMD_5.2MM]  119.13,67.06 180 top
TP1  TEST-POINT3X5  [PAD.03X.05]  67.82,42.42 0 bottom
TP2  TEST-POINT3X5  [PAD.03X.05]  30.99,37.34 0 bottom
TP3  TEST-POINT3X5  [PAD.03X.05]  32.26,34.8 0 bottom
TP4  TEST-POINT3X5  [PAD.03X.05]  157.23,42.42 0 bottom
TP5  TEST-POINT3X5  [PAD.03X.05]  120.4,37.34 0 bottom
TP6  TEST-POINT3X5  [PAD.03X.05]  121.67,34.8 0 bottom
TP7  TEST-POINT3X5  [PAD.03X.05]  67.82,98.81 0 bottom
TP8  TEST-POINT3X5  [PAD.03X.05]  30.99,93.73 0 bottom
TP9  TEST-POINT3X5  [PAD.03X.05]  32.26,91.19 0 bottom
TP10  TEST-POINT3X5  [PAD.03X.05]  157.23,98.81 0 bottom
TP11  TEST-POINT3X5  [PAD.03X.05]  120.4,93.73 0 bottom
TP12  TEST-POINT3X5  [PAD.03X.05]  121.67,91.19 0 bottom
U1  AP7361C-33  [UDFN-8]  109.73,24.64 0 top
U2  AP7361C-33  [UDFN-8]  20.32,81.03 0 top
U3  AP7361C-33  [UDFN-8]  109.73,81.03 0 top
U5  AP7361C-33  [UDFN-8]  20.32,24.64 0 top
U$1  [#A0#10]  48.77,15.88 90 top
U$2  [#A1#10]  51.31,15.62 90 top
U$3  [#GND#0]  86.23,22.1 0 top
U$4  [#G0#2]  64.01,15.75 90 top
U$5  [#RESET10]  21.82,14.03 0 top
U$6  [#D0#0]  83.06,53.85 90 top
U$7  [#G1#2]  66.55,15.62 90 top
U$8  [#G2#2]  70.36,15.75 90 top
U$9  [#G3#3]  72.9,15.75 90 top
U$10  [#G4#4]  75.44,15.75 90 top
U$11  [#G5#5]  77.98,15.75 90 top
U$12  [#G6#6]  80.52,15.75 90 top
U$13  [#G7#7]  83.06,15.75 90 top
U$14  [#G8#8]  85.6,15.75 90 top
U$15  [#G9#9]  61.47,15.75 90 top
U$16  [#G10#10]  58.93,16.13 90 top
U$17  [#G11#10]  88.14,16 90 top
U$18  [#PWM0#10]  53.85,17.14 90 top
U$19  [#PWM1#10]  56.39,17.02 90 top
U$20  [##CS1##5178039]  32.26,53.47 90 top
U$21  [##I2C_INT##10]  85.09,32.26 0 top
U$22  [#CAN_RX#9]  72.9,52.07 90 top
U$23  [#CAN_TX#10]  75.44,51.94 90 top
U$24  [#CIPO#3]  29.72,53.09 90 top
U$25  [#COPI#2]  27.18,53.09 90 top
U$26  [#CTS#6]  64.01,53.34 90 top
U$27  [#GND#0]  44.96,16.26 90 top
U$28  [#SCK#2]  24.64,53.34 90 top
U$29  [#I2S_FS#5]  56.39,52.7 90 top
U$30  [#I2S_SDI#5]  53.85,52.45 90 top
U$31  [#I2S_SDO#5]  51.31,52.07 90 top
U$32  [#MCLK#4]  48.77,52.83 90 top
U$33  [#RTS#5]  61.47,53.47 90 top
U$34  [#RX#8]  70.36,53.85 90 top
U$35  [#TX#7]  66.55,53.72 90 top
U$36  [#DAT1#5178039]  37.34,52.83 90 top
U$37  [##RESET##7]  42.47,17.25 90 top
U$38  [#3V3#1]  39.88,16.38 90 top
U$39  [#BYP#8]  23.75,34.47 0 top
U$40  [#HOST_D##9]  30.61,41.66 0 top
U$41  [#HOST_D##10]  30.48,44.2 0 top
U$42  [#MEAS#10]  20.83,19.3 0 top
U$43  [BOOT10]  30.1,13.97 0 top
U$44  [#SDA#4]  86.23,27.18 0 top
U$45  [#VIN#6]  37.34,16.13 90 top
U$46  [#GND#0]  28.96,39.12 0 top
U$47  [#GND#0]  86.23,37.34 0 top
U$48  [#EN#0]  30.73,25.02 0 top
U$49  [#SCL#5]  86.36,29.72 0 top
U$50  [#VHOST#0]  29.97,46.74 0 bottom
U$51  [#SWD#10]  27.43,33.44 90 top
U$52  [#I2S_CLK#5]  58.93,52.07 90 top
U$53  [#DAT2#5178039]  34.8,52.7 90 top
U$54  [#CIPO1#5178039]  39.88,52.7 90 top
U$55  [22229]  57.02,25.91 0 top
U$56  [##CIPO1##DAT0#5178038]  39.85,55.67 270 bottom
U$57  [#COPI1#2]  42.42,52.83 90 top
U$58  [#GND#0]  88.14,53.21 90 top
U$59  [##CS##0]  22.1,53.85 90 top
U$60  [#3V3#1]  86.23,39.88 0 top
U$61  [#3V3#1]  17.02,53.34 90 top
U$62  [ATP0]  78.49,22.61 0 top
U$63  [#RX2#3]  80.52,53.21 90 top
U$64  [#TX2#2]  77.98,53.21 90 top
U$65  [#SCL1#3]  86.11,44.98 0 top
U$66  [#SDA1#3]  85.93,42.44 0 top
U$67  [#SCK1#2]  44.96,53.09 90 top
U$68  [VIN3]  16.13,12.32 0 top
U$69  [3V34]  16,17.02 0 top
U$70  [#3V3#1]  86.23,24.64 0 top
U$71  [I2C4]  92.2,12.83 0 top
U$72  [I2C14]  93.09,54.48 0 top
U$73  [ATP_CARRIER_BOARD1]  45.21,28.57 0 bottom
U$74  [22229]  146.43,25.91 0 top
U$75  [#COPI1#2]  42.42,58.17 270 bottom
U$76  [#RX2#3]  80.52,58.93 270 bottom
U$77  [#SCK1#2]  44.96,58.55 270 bottom
U$78  [#SCL1#3]  91.69,44.96 0 bottom
U$79  [#SDA1#3]  91.57,42.42 0 bottom
U$80  [#TX2#2]  77.98,58.8 270 bottom
U$81  [##CS##5178037]  22.1,59.31 270 bottom
U$82  [#DAT2#5]  34.8,58.17 270 bottom
U$83  [#DAT1#5]  37.34,58.29 270 bottom
U$84  [##CS1##DAT3#5178037]  32.26,56.51 270 bottom
U$85  [#COPI#4]  27.18,58.55 270 bottom
U$86  [#SCK#4]  24.64,58.93 270 bottom
U$87  [#MCLK#6]  48.77,58.29 270 bottom
U$88  [#3V3#1]  17.02,58.8 270 bottom
U$89  [#GND#0]  20.32,53.21 90 top
U$90  [#I2S_FS#7]  56.39,58.04 270 bottom
U$91  [#I2S_CLK#7]  58.93,57.66 270 bottom
U$92  [#RTS#7]  61.47,58.8 270 bottom
U$93  [#CTS#8]  64.01,58.8 270 bottom
U$94  [#TX#9]  66.55,59.18 270 bottom
U$95  [#RX#10]  70.36,59.31 270 bottom
U$96  [#CAN_RX#10]  72.9,57.53 270 bottom
U$97  [#CAN_TX#10]  75.44,57.53 270 bottom
U$98  [#D0#0]  83.06,59.44 270 bottom
U$99  [D10]  85.6,52.2 90 top
U$100  [#GND#0]  88.14,58.8 270 bottom
U$101  [#GND#0]  91.82,37.21 0 bottom
U$102  [#GND#0]  91.82,22.1 0 bottom
U$103  [#GND#0]  44.96,10.79 270 bottom
U$104  [#GND#0]  19.56,58.8 270 bottom
U$105  [#GND#0]  28.96,39.12 0 bottom
U$106  [#3V3#1]  91.82,39.88 0 bottom
U$107  [#3V3#1]  91.82,24.51 0 bottom
U$108  [#SDA#4]  91.82,27.18 0 bottom
U$109  [#SCL#5]  91.95,29.72 0 bottom
U$110  [##I2C_INT##10]  90.55,32.26 0 bottom
U$111  [#G11#10]  88.14,10.41 270 bottom
U$112  [#G8#8]  85.6,10.16 270 bottom
U$113  [#G7#7]  83.06,10.16 270 bottom
U$114  [#G6#6]  80.52,10.16 270 bottom
U$115  [#G5#5]  77.98,10.16 270 bottom
U$116  [#G4#4]  75.44,10.16 270 bottom
U$117  [#G3#3]  72.9,10.16 270 bottom
U$118  [#G2#2]  70.36,10.16 270 bottom
U$119  [#G1#2]  66.55,10.03 270 bottom
U$120  [#G0#2]  63.88,10.16 270 bottom
U$121  [#PWM0#10]  53.85,11.56 270 bottom
U$122  [#PWM1#10]  56.39,11.3 270 bottom
U$123  [#A0#10]  48.77,10.29 270 bottom
U$124  [#A1#10]  51.31,10.16 270 bottom
U$125  [##RESET##7]  42.42,11.68 270 bottom
U$126  [#3V3#1]  39.88,10.79 270 bottom
U$127  [#VIN#6]  37.34,10.67 270 bottom
U$128  [#HOST_D##9]  30.61,41.66 0 bottom
U$129  [#HOST_D##10]  30.48,44.2 0 bottom
U$130  [#CAN_RX#9]  162.31,52.07 90 top
U$131  [#SWD#10]  27.43,33.47 270 bottom
U$132  [#MEAS#10]  20.83,19.3 0 bottom
U$133  [#VIN_LED#10]  20.45,13.72 0 bottom
U$134  [#3V3_LED#10]  20.7,15.75 0 bottom
U$135  [#G9#ADC##CAM_HSYNC#9]  61.47,17.4 270 bottom
U$136  [#G10#ADC##CAM_VSYNC#10]  58.8,17.91 270 bottom
U$137  [#I2S_SDI#CAM_PCLK#7]  53.85,53.72 270 bottom
U$138  [#I2S_SDO#CAM_MCLK#7]  51.31,53.21 270 bottom
U$139  [MOUNT10]  77.78,38.5 0 top
U$140  [MICROMOD_MI_LOGO_1]  70.74,22.86 0 top
U$141  [MOUNT10]  77.78,28.34 0 top
U$142  [MOUNT10]  77.68,28.34 0 bottom
U$143  [MOUNT10]  77.68,38.5 0 bottom
U$144  [MICROMOD_LOGO_1]  45.85,35.18 0 bottom
U$145  [D10]  85.6,61.21 270 bottom
U$146  [#VHOST#0]  29.97,46.74 0 top
U$147  [#CIPO#5178038]  29.72,58.55 270 bottom
U$148  [#CAN_TX#10]  164.85,51.94 90 top
U$149  [#CIPO#3]  119.13,53.09 90 top
U$150  [#COPI#2]  116.59,53.09 90 top
U$151  [#CTS#6]  153.42,53.34 90 top
U$152  [#I2S_FS#5]  145.8,52.7 90 top
U$153  [#I2S_SDI#5]  143.26,52.45 90 top
U$154  [#I2S_SDO#5]  140.72,52.07 90 top
U$155  [#MCLK#4]  138.18,52.83 90 top
U$156  [#RTS#5]  150.88,53.47 90 top
U$157  [#RX#8]  159.77,53.85 90 top
U$158  [#TX#7]  155.96,53.72 90 top
U$159  [#BYP#8]  113.16,34.47 0 top
U$160  [#GND#0]  134.37,16.26 90 top
U$161  [#HOST_D##9]  120.02,41.66 0 top
U$162  [#HOST_D##10]  119.89,44.2 0 top
U$163  [#RESET10]  111.23,14.03 0 top
U$164  [BOOT10]  119.51,13.97 0 top
U$165  [#VIN#6]  126.75,16.13 90 top
U$166  [#GND#0]  118.36,39.12 0 top
U$167  [#GND#0]  175.64,37.34 0 top
U$168  [#SCL#5]  175.77,29.72 0 top
U$169  [#A0#10]  138.18,15.88 90 top
U$170  [#A1#10]  140.72,15.62 90 top
U$171  [#D0#0]  172.47,53.85 90 top
U$172  [#G0#2]  153.42,15.75 90 top
U$173  [#G1#2]  155.96,15.62 90 top
U$174  [#G2#2]  159.77,15.75 90 top
U$175  [#G3#3]  162.31,15.75 90 top
U$176  [#G4#4]  164.85,15.75 90 top
U$177  [#G5#5]  167.39,15.75 90 top
U$178  [#G6#6]  169.93,15.75 90 top
U$179  [#G7#7]  172.47,15.75 90 top
U$180  [#G8#8]  175.01,15.75 90 top
U$181  [#G9#9]  150.88,15.75 90 top
U$182  [#G10#10]  148.34,16.13 90 top
U$183  [#G11#10]  177.55,16 90 top
U$184  [#PWM0#10]  143.26,17.14 90 top
U$185  [#PWM1#10]  145.8,17.02 90 top
U$186  [#MEAS#10]  110.24,19.3 0 top
U$187  [#SDA#4]  175.64,27.18 0 top
U$188  [#SWD#10]  116.84,33.44 90 top
U$189  [#I2S_CLK#5]  148.34,52.07 90 top
U$190  [#RX2#3]  169.93,53.21 90 top
U$191  [#TX2#2]  167.39,53.21 90 top
U$192  [#SCL1#3]  175.51,44.98 0 top
U$193  [#SDA1#3]  175.34,42.44 0 top
U$194  [#SCK1#2]  134.37,53.09 90 top
U$195  [VIN3]  105.54,12.32 0 top
U$196  [3V34]  105.41,17.02 0 top
U$197  [#3V3#1]  129.29,16.38 90 top
U$198  [#3V3#1]  175.64,24.64 0 top
U$199  [#3V3#1]  175.64,39.88 0 top
U$200  [#3V3#1]  106.43,53.34 90 top
U$201  [ATP0]  167.89,22.61 0 top
U$202  [I2C4]  181.61,12.83 0 top
U$203  [I2C14]  182.5,54.48 0 top
U$204  [ATP_CARRIER_BOARD1]  134.62,28.57 0 bottom
U$205  [#COPI1#2]  131.83,52.83 90 top
U$206  [##RESET##7]  131.88,17.25 90 top
U$207  [##CS##0]  111.51,53.85 90 top
U$208  [#COPI1#2]  131.83,58.17 270 bottom
U$209  [#RX2#3]  169.93,58.93 270 bottom
U$210  [#SCK1#2]  134.37,58.55 270 bottom
U$211  [#SCL1#3]  181.1,44.96 0 bottom
U$212  [#SDA1#3]  180.97,42.42 0 bottom
U$213  [#TX2#2]  167.39,58.8 270 bottom
U$214  [#DAT2#5]  124.21,58.17 270 bottom
U$215  [#DAT1#5]  126.75,58.29 270 bottom
U$216  [#COPI#4]  116.59,58.55 270 bottom
U$217  [#SCK#4]  114.05,58.93 270 bottom
U$218  [#MCLK#6]  138.18,58.29 270 bottom
U$219  [#I2S_FS#7]  145.8,58.04 270 bottom
U$220  [#I2S_CLK#7]  148.34,57.66 270 bottom
U$221  [#RTS#7]  150.88,58.8 270 bottom
U$222  [#CTS#8]  153.42,58.8 270 bottom
U$223  [#TX#9]  155.96,59.18 270 bottom
U$224  [#RX#10]  159.77,59.31 270 bottom
U$225  [#CAN_RX#10]  162.31,57.53 270 bottom
U$226  [#CAN_TX#10]  164.85,57.53 270 bottom
U$227  [#D0#0]  172.47,59.44 270 bottom
U$228  [#GND#0]  177.55,58.8 270 bottom
U$229  [#GND#0]  181.23,37.21 0 bottom
U$230  [#GND#0]  181.23,22.1 0 bottom
U$231  [#GND#0]  134.37,10.79 270 bottom
U$232  [#GND#0]  108.97,58.8 270 bottom
U$233  [#GND#0]  118.36,39.12 0 bottom
U$234  [#3V3#1]  181.23,39.88 0 bottom
U$235  [#3V3#1]  181.23,24.51 0 bottom
U$236  [#SDA#4]  181.23,27.18 0 bottom
U$237  [#SCL#5]  181.36,29.72 0 bottom
U$238  [##I2C_INT##10]  179.96,32.26 0 bottom
U$239  [#G11#10]  177.55,10.41 270 bottom
U$240  [#G8#8]  175.01,10.16 270 bottom
U$241  [#G7#7]  172.47,10.16 270 bottom
U$242  [#G6#6]  169.93,10.16 270 bottom
U$243  [#G5#5]  167.39,10.16 270 bottom
U$244  [#G4#4]  164.85,10.16 270 bottom
U$245  [#G3#3]  162.31,10.16 270 bottom
U$246  [#G2#2]  159.77,10.16 270 bottom
U$247  [#G1#2]  155.96,10.03 270 bottom
U$248  [#G0#2]  153.29,10.16 270 bottom
U$249  [#PWM0#10]  143.26,11.56 270 bottom
U$250  [#PWM1#10]  145.8,11.3 270 bottom
U$251  [#A0#10]  138.18,10.29 270 bottom
U$252  [#A1#10]  140.72,10.16 270 bottom
U$253  [##RESET##7]  131.83,11.68 270 bottom
U$254  [#3V3#1]  129.29,10.79 270 bottom
U$255  [#VIN#6]  126.75,10.67 270 bottom
U$256  [#HOST_D##9]  120.02,41.66 0 bottom
U$257  [#HOST_D##10]  119.89,44.2 0 bottom
U$258  [#SWD#10]  116.84,33.47 270 bottom
U$259  [#MEAS#10]  110.24,19.3 0 bottom
U$260  [#VIN_LED#10]  109.85,13.72 0 bottom
U$261  [#3V3_LED#10]  110.11,15.75 0 bottom
U$262  [#G9#ADC##CAM_HSYNC#9]  150.88,17.4 270 bottom
U$263  [#G10#ADC##CAM_VSYNC#10]  148.21,17.91 270 bottom
U$264  [#I2S_SDI#CAM_PCLK#7]  143.26,53.72 270 bottom
U$265  [#I2S_SDO#CAM_MCLK#7]  140.72,53.21 270 bottom
U$266  [#3V3#1]  106.43,58.8 270 bottom
U$267  [#SCK#2]  114.05,53.34 90 top
U$268  [#GND#0]  175.64,22.1 0 top
U$269  [#GND#0]  177.55,53.21 90 top
U$270  [#GND#0]  109.73,53.21 90 top
U$271  [##I2C_INT##10]  174.5,32.26 0 top
U$272  [D10]  175.01,52.2 90 top
U$273  [MICROMOD_MI_LOGO_1]  160.15,22.86 0 top
U$274  [MOUNT10]  167.19,38.5 0 top
U$275  [MOUNT10]  167.19,28.34 0 top
U$276  [MOUNT10]  167.09,28.34 0 bottom
U$277  [MOUNT10]  167.09,38.5 0 bottom
U$278  [MICROMOD_LOGO_1]  135.25,35.18 0 bottom
U$279  [D10]  175.01,61.21 270 bottom
U$280  [#EN#0]  120.14,25.02 0 top
U$281  [#VHOST#0]  119.38,46.74 0 top
U$282  [#VHOST#0]  119.38,46.74 0 bottom
U$283  [##CS##5178037]  111.51,59.31 270 bottom
U$284  [##CS1##DAT3#5178037]  121.67,56.51 270 bottom
U$285  [#CIPO#5178038]  119.13,58.55 270 bottom
U$286  [##CS1##5178039]  121.67,53.47 90 top
U$287  [#DAT1#5178039]  126.75,52.83 90 top
U$288  [#DAT2#5178039]  124.21,52.7 90 top
U$289  [#CIPO1#5178039]  129.29,52.7 90 top
U$290  [##CIPO1##DAT0#5178038]  129.26,55.67 270 bottom
U$291  [22229]  57.02,82.3 0 top
U$292  [#CAN_RX#9]  72.9,108.46 90 top
U$293  [#CAN_TX#10]  75.44,108.33 90 top
U$294  [#CIPO#3]  29.72,109.47 90 top
U$295  [#COPI#2]  27.18,109.47 90 top
U$296  [#CTS#6]  64.01,109.73 90 top
U$297  [#I2S_FS#5]  56.39,109.09 90 top
U$298  [#I2S_SDI#5]  53.85,108.84 90 top
U$299  [#I2S_SDO#5]  51.31,108.46 90 top
U$300  [#MCLK#4]  48.77,109.22 90 top
U$301  [#RTS#5]  61.47,109.86 90 top
U$302  [#RX#8]  70.36,110.24 90 top
U$303  [#TX#7]  66.55,110.11 90 top
U$304  [#BYP#8]  23.75,90.86 0 top
U$305  [#GND#0]  44.96,72.64 90 top
U$306  [#HOST_D##9]  30.61,98.04 0 top
U$307  [#HOST_D##10]  30.48,100.58 0 top
U$308  [#RESET10]  21.82,70.42 0 top
U$309  [BOOT10]  30.1,70.36 0 top
U$310  [#VIN#6]  37.34,72.52 90 top
U$311  [#GND#0]  28.96,95.5 0 top
U$312  [#GND#0]  86.23,93.73 0 top
U$313  [#SCL#5]  86.36,86.11 0 top
U$314  [#A0#10]  48.77,72.26 90 top
U$315  [#A1#10]  51.31,72.01 90 top
U$316  [#D0#0]  83.06,110.24 90 top
U$317  [#G0#2]  64.01,72.14 90 top
U$318  [#G1#2]  66.55,72.01 90 top
U$319  [#G2#2]  70.36,72.14 90 top
U$320  [#G3#3]  72.9,72.14 90 top
U$321  [#G4#4]  75.44,72.14 90 top
U$322  [#G5#5]  77.98,72.14 90 top
U$323  [#G6#6]  80.52,72.14 90 top
U$324  [#G7#7]  83.06,72.14 90 top
U$325  [#G8#8]  85.6,72.14 90 top
U$326  [#G9#9]  61.47,72.14 90 top
U$327  [#G10#10]  58.93,72.52 90 top
U$328  [#G11#10]  88.14,72.39 90 top
U$329  [#PWM0#10]  53.85,73.53 90 top
U$330  [#PWM1#10]  56.39,73.41 90 top
U$331  [#MEAS#10]  20.83,75.69 0 top
U$332  [#SDA#4]  86.23,83.57 0 top
U$333  [#SWD#10]  27.43,89.83 90 top
U$334  [#I2S_CLK#5]  58.93,108.46 90 top
U$335  [#RX2#3]  80.52,109.6 90 top
U$336  [#TX2#2]  77.98,109.6 90 top
U$337  [#SCL1#3]  86.11,101.37 0 top
U$338  [#SDA1#3]  85.93,98.83 0 top
U$339  [#SCK1#2]  44.96,109.47 90 top
U$340  [VIN3]  16.13,68.71 0 top
U$341  [3V34]  16,73.41 0 top
U$342  [#3V3#1]  39.88,72.77 90 top
U$343  [#3V3#1]  86.23,81.03 0 top
U$344  [#3V3#1]  86.23,96.27 0 top
U$345  [#3V3#1]  17.02,109.73 90 top
U$346  [ATP0]  78.49,78.99 0 top
U$347  [I2C4]  92.2,69.22 0 top
U$348  [I2C14]  93.09,110.87 0 top
U$349  [ATP_CARRIER_BOARD1]  45.21,84.96 0 bottom
U$350  [#COPI1#2]  42.42,109.22 90 top
U$351  [##RESET##7]  42.47,73.63 90 top
U$352  [##CS##0]  22.1,110.24 90 top
U$353  [#COPI1#2]  42.42,114.55 270 bottom
U$354  [#RX2#3]  80.52,115.32 270 bottom
U$355  [#SCK1#2]  44.96,114.94 270 bottom
U$356  [#SCL1#3]  91.69,101.35 0 bottom
U$357  [#SDA1#3]  91.57,98.81 0 bottom
U$358  [#TX2#2]  77.98,115.19 270 bottom
U$359  [#DAT2#5]  34.8,114.55 270 bottom
U$360  [#DAT1#5]  37.34,114.68 270 bottom
U$361  [#COPI#4]  27.18,114.94 270 bottom
U$362  [#SCK#4]  24.64,115.32 270 bottom
U$363  [#MCLK#6]  48.77,114.68 270 bottom
U$364  [#I2S_FS#7]  56.39,114.43 270 bottom
U$365  [#I2S_CLK#7]  58.93,114.05 270 bottom
U$366  [#RTS#7]  61.47,115.19 270 bottom
U$367  [#CTS#8]  64.01,115.19 270 bottom
U$368  [#TX#9]  66.55,115.57 270 bottom
U$369  [#RX#10]  70.36,115.7 270 bottom
U$370  [#CAN_RX#10]  72.9,113.92 270 bottom
U$371  [#CAN_TX#10]  75.44,113.92 270 bottom
U$372  [#D0#0]  83.06,115.82 270 bottom
U$373  [#GND#0]  88.14,115.19 270 bottom
U$374  [#GND#0]  91.82,93.6 0 bottom
U$375  [#GND#0]  91.82,78.49 0 bottom
U$376  [#GND#0]  44.96,67.18 270 bottom
U$377  [#GND#0]  19.56,115.19 270 bottom
U$378  [#GND#0]  28.96,95.5 0 bottom
U$379  [#3V3#1]  91.82,96.27 0 bottom
U$380  [#3V3#1]  91.82,80.9 0 bottom
U$381  [#SDA#4]  91.82,83.57 0 bottom
U$382  [#SCL#5]  91.95,86.11 0 bottom
U$383  [##I2C_INT##10]  90.55,88.65 0 bottom
U$384  [#G11#10]  88.14,66.8 270 bottom
U$385  [#G8#8]  85.6,66.55 270 bottom
U$386  [#G7#7]  83.06,66.55 270 bottom
U$387  [#G6#6]  80.52,66.55 270 bottom
U$388  [#G5#5]  77.98,66.55 270 bottom
U$389  [#G4#4]  75.44,66.55 270 bottom
U$390  [#G3#3]  72.9,66.55 270 bottom
U$391  [#G2#2]  70.36,66.55 270 bottom
U$392  [#G1#2]  66.55,66.42 270 bottom
U$393  [#G0#2]  63.88,66.55 270 bottom
U$394  [#PWM0#10]  53.85,67.95 270 bottom
U$395  [#PWM1#10]  56.39,67.69 270 bottom
U$396  [#A0#10]  48.77,66.67 270 bottom
U$397  [#A1#10]  51.31,66.55 270 bottom
U$398  [##RESET##7]  42.42,68.07 270 bottom
U$399  [#3V3#1]  39.88,67.18 270 bottom
U$400  [#VIN#6]  37.34,67.06 270 bottom
U$401  [#HOST_D##9]  30.61,98.04 0 bottom
U$402  [#HOST_D##10]  30.48,100.58 0 bottom
U$403  [#SWD#10]  27.43,89.86 270 bottom
U$404  [#MEAS#10]  20.83,75.69 0 bottom
U$405  [#VIN_LED#10]  20.45,70.1 0 bottom
U$406  [#3V3_LED#10]  20.7,72.14 0 bottom
U$407  [#G9#ADC##CAM_HSYNC#9]  61.47,73.79 270 bottom
U$408  [#G10#ADC##CAM_VSYNC#10]  58.8,74.3 270 bottom
U$409  [#I2S_SDI#CAM_PCLK#7]  53.85,110.11 270 bottom
U$410  [#I2S_SDO#CAM_MCLK#7]  51.31,109.6 270 bottom
U$411  [#3V3#1]  17.02,115.19 270 bottom
U$412  [#SCK#2]  24.64,109.73 90 top
U$413  [#GND#0]  86.23,78.49 0 top
U$414  [#GND#0]  88.14,109.6 90 top
U$415  [#GND#0]  20.32,109.6 90 top
U$416  [##I2C_INT##10]  85.09,88.65 0 top
U$417  [D10]  85.6,108.59 90 top
U$418  [MICROMOD_MI_LOGO_1]  70.74,79.25 0 top
U$419  [MOUNT10]  77.78,94.89 0 top
U$420  [MOUNT10]  77.78,84.73 0 top
U$421  [MOUNT10]  77.68,84.73 0 bottom
U$422  [MOUNT10]  77.68,94.89 0 bottom
U$423  [MICROMOD_LOGO_1]  45.85,91.57 0 bottom
U$424  [D10]  85.6,117.6 270 bottom
U$425  [#EN#0]  30.73,81.41 0 top
U$426  [#VHOST#0]  29.97,103.12 0 top
U$427  [#VHOST#0]  29.97,103.12 0 bottom
U$428  [##CS##5178037]  22.1,115.7 270 bottom
U$429  [##CS1##DAT3#5178037]  32.26,112.9 270 bottom
U$430  [#CIPO#5178038]  29.72,114.94 270 bottom
U$431  [##CS1##5178039]  32.26,109.86 90 top
U$432  [#DAT1#5178039]  37.34,109.22 90 top
U$433  [#DAT2#5178039]  34.8,109.09 90 top
U$434  [#CIPO1#5178039]  39.88,109.09 90 top
U$435  [##CIPO1##DAT0#5178038]  39.85,112.06 270 bottom
U$436  [22229]  146.43,82.3 0 top
U$437  [#CAN_RX#9]  162.31,108.46 90 top
U$438  [#CAN_TX#10]  164.85,108.33 90 top
U$439  [#CIPO#3]  119.13,109.47 90 top
U$440  [#COPI#2]  116.59,109.47 90 top
U$441  [#CTS#6]  153.42,109.73 90 top
U$442  [#I2S_FS#5]  145.8,109.09 90 top
U$443  [#I2S_SDI#5]  143.26,108.84 90 top
U$444  [#I2S_SDO#5]  140.72,108.46 90 top
U$445  [#MCLK#4]  138.18,109.22 90 top
U$446  [#RTS#5]  150.88,109.86 90 top
U$447  [#RX#8]  159.77,110.24 90 top
U$448  [#TX#7]  155.96,110.11 90 top
U$449  [#BYP#8]  113.16,90.86 0 top
U$450  [#GND#0]  134.37,72.64 90 top
U$451  [#HOST_D##9]  120.02,98.04 0 top
U$452  [#HOST_D##10]  119.89,100.58 0 top
U$453  [#RESET10]  111.23,70.42 0 top
U$454  [BOOT10]  119.51,70.36 0 top
U$455  [#VIN#6]  126.75,72.52 90 top
U$456  [#GND#0]  118.36,95.5 0 top
U$457  [#GND#0]  175.64,93.73 0 top
U$458  [#SCL#5]  175.77,86.11 0 top
U$459  [#A0#10]  138.18,72.26 90 top
U$460  [#A1#10]  140.72,72.01 90 top
U$461  [#D0#0]  172.47,110.24 90 top
U$462  [#G0#2]  153.42,72.14 90 top
U$463  [#G1#2]  155.96,72.01 90 top
U$464  [#G2#2]  159.77,72.14 90 top
U$465  [#G3#3]  162.31,72.14 90 top
U$466  [#G4#4]  164.85,72.14 90 top
U$467  [#G5#5]  167.39,72.14 90 top
U$468  [#G6#6]  169.93,72.14 90 top
U$469  [#G7#7]  172.47,72.14 90 top
U$470  [#G8#8]  175.01,72.14 90 top
U$471  [#G9#9]  150.88,72.14 90 top
U$472  [#G10#10]  148.34,72.52 90 top
U$473  [#G11#10]  177.55,72.39 90 top
U$474  [#PWM0#10]  143.26,73.53 90 top
U$475  [#PWM1#10]  145.8,73.41 90 top
U$476  [#MEAS#10]  110.24,75.69 0 top
U$477  [#SDA#4]  175.64,83.57 0 top
U$478  [#SWD#10]  116.84,89.83 90 top
U$479  [#I2S_CLK#5]  148.34,108.46 90 top
U$480  [#RX2#3]  169.93,109.6 90 top
U$481  [#TX2#2]  167.39,109.6 90 top
U$482  [#SCL1#3]  175.51,101.37 0 top
U$483  [#SDA1#3]  175.34,98.83 0 top
U$484  [#SCK1#2]  134.37,109.47 90 top
U$485  [VIN3]  105.54,68.71 0 top
U$486  [3V34]  105.41,73.41 0 top
U$487  [#3V3#1]  129.29,72.77 90 top
U$488  [#3V3#1]  175.64,81.03 0 top
U$489  [#3V3#1]  175.64,96.27 0 top
U$490  [#3V3#1]  106.43,109.73 90 top
U$491  [ATP0]  167.89,78.99 0 top
U$492  [I2C4]  181.61,69.22 0 top
U$493  [I2C14]  182.5,110.87 0 top
U$494  [ATP_CARRIER_BOARD1]  134.62,84.96 0 bottom
U$495  [#COPI1#2]  131.83,109.22 90 top
U$496  [##RESET##7]  131.88,73.63 90 top
U$497  [##CS##0]  111.51,110.24 90 top
U$498  [#COPI1#2]  131.83,114.55 270 bottom
U$499  [#RX2#3]  169.93,115.32 270 bottom
U$500  [#SCK1#2]  134.37,114.94 270 bottom
U$501  [#SCL1#3]  181.1,101.35 0 bottom
U$502  [#SDA1#3]  180.97,98.81 0 bottom
U$503  [#TX2#2]  167.39,115.19 270 bottom
U$504  [#DAT2#5]  124.21,114.55 270 bottom
U$505  [#DAT1#5]  126.75,114.68 270 bottom
U$506  [#COPI#4]  116.59,114.94 270 bottom
U$507  [#SCK#4]  114.05,115.32 270 bottom
U$508  [#MCLK#6]  138.18,114.68 270 bottom
U$509  [#I2S_FS#7]  145.8,114.43 270 bottom
U$510  [#I2S_CLK#7]  148.34,114.05 270 bottom
U$511  [#RTS#7]  150.88,115.19 270 bottom
U$512  [#CTS#8]  153.42,115.19 270 bottom
U$513  [#TX#9]  155.96,115.57 270 bottom
U$514  [#RX#10]  159.77,115.7 270 bottom
U$515  [#CAN_RX#10]  162.31,113.92 270 bottom
U$516  [#CAN_TX#10]  164.85,113.92 270 bottom
U$517  [#D0#0]  172.47,115.82 270 bottom
U$518  [#GND#0]  177.55,115.19 270 bottom
U$519  [#GND#0]  181.23,93.6 0 bottom
U$520  [#GND#0]  181.23,78.49 0 bottom
U$521  [#GND#0]  134.37,67.18 270 bottom
U$522  [#GND#0]  108.97,115.19 270 bottom
U$523  [#GND#0]  118.36,95.5 0 bottom
U$524  [#3V3#1]  181.23,96.27 0 bottom
U$525  [#3V3#1]  181.23,80.9 0 bottom
U$526  [#SDA#4]  181.23,83.57 0 bottom
U$527  [#SCL#5]  181.36,86.11 0 bottom
U$528  [##I2C_INT##10]  179.96,88.65 0 bottom
U$529  [#G11#10]  177.55,66.8 270 bottom
U$530  [#G8#8]  175.01,66.55 270 bottom
U$531  [#G7#7]  172.47,66.55 270 bottom
U$532  [#G6#6]  169.93,66.55 270 bottom
U$533  [#G5#5]  167.39,66.55 270 bottom
U$534  [#G4#4]  164.85,66.55 270 bottom
U$535  [#G3#3]  162.31,66.55 270 bottom
U$536  [#G2#2]  159.77,66.55 270 bottom
U$537  [#G1#2]  155.96,66.42 270 bottom
U$538  [#G0#2]  153.29,66.55 270 bottom
U$539  [#PWM0#10]  143.26,67.95 270 bottom
U$540  [#PWM1#10]  145.8,67.69 270 bottom
U$541  [#A0#10]  138.18,66.67 270 bottom
U$542  [#A1#10]  140.72,66.55 270 bottom
U$543  [##RESET##7]  131.83,68.07 270 bottom
U$544  [#3V3#1]  129.29,67.18 270 bottom
U$545  [#VIN#6]  126.75,67.06 270 bottom
U$546  [#HOST_D##9]  120.02,98.04 0 bottom
U$547  [#HOST_D##10]  119.89,100.58 0 bottom
U$548  [#SWD#10]  116.84,89.86 270 bottom
U$549  [#MEAS#10]  110.24,75.69 0 bottom
U$550  [#VIN_LED#10]  109.85,70.1 0 bottom
U$551  [#3V3_LED#10]  110.11,72.14 0 bottom
U$552  [#G9#ADC##CAM_HSYNC#9]  150.88,73.79 270 bottom
U$553  [#G10#ADC##CAM_VSYNC#10]  148.21,74.3 270 bottom
U$554  [#I2S_SDI#CAM_PCLK#7]  143.26,110.11 270 bottom
U$555  [#I2S_SDO#CAM_MCLK#7]  140.72,109.6 270 bottom
U$556  [#3V3#1]  106.43,115.19 270 bottom
U$557  [#SCK#2]  114.05,109.73 90 top
U$558  [#GND#0]  175.64,78.49 0 top
U$559  [#GND#0]  177.55,109.6 90 top
U$560  [#GND#0]  109.73,109.6 90 top
U$561  [##I2C_INT##10]  174.5,88.65 0 top
U$562  [D10]  175.01,108.59 90 top
U$563  [MICROMOD_MI_LOGO_1]  160.15,79.25 0 top
U$564  [MOUNT10]  167.19,94.89 0 top
U$565  [MOUNT10]  167.19,84.73 0 top
U$566  [MOUNT10]  167.09,84.73 0 bottom
U$567  [MOUNT10]  167.09,94.89 0 bottom
U$568  [MICROMOD_LOGO_1]  135.25,91.57 0 bottom
U$569  [D10]  175.01,117.6 270 bottom
U$570  [#EN#0]  120.14,81.41 0 top
U$571  [#VHOST#0]  119.38,103.12 0 top
U$572  [#VHOST#0]  119.38,103.12 0 bottom
U$573  [##CS##5178037]  111.51,115.7 270 bottom
U$574  [##CS1##DAT3#5178037]  121.67,112.9 270 bottom
U$575  [#CIPO#5178038]  119.13,114.94 270 bottom
U$576  [##CS1##5178039]  121.67,109.86 90 top
U$577  [#DAT1#5178039]  126.75,109.22 90 top
U$578  [#DAT2#5178039]  124.21,109.09 90 top
U$579  [#CIPO1#5178039]  129.29,109.09 90 top
U$580  [##CIPO1##DAT0#5178038]  129.26,112.06 270 bottom
VIN_LED  JUMPER-SMT_2_NC_TRACE_SILK  [SMT-JUMPER_2_NC_TRACE_SILK]  16,13.72 0 bottom
VIN_LED1  JUMPER-SMT_2_NC_TRACE_SILK  [SMT-JUMPER_2_NC_TRACE_SILK]  105.41,13.72 0 bottom
VIN_LED2  JUMPER-SMT_2_NC_TRACE_SILK  [SMT-JUMPER_2_NC_TRACE_SILK]  16,70.1 0 bottom
VIN_LED3  JUMPER-SMT_2_NC_TRACE_SILK  [SMT-JUMPER_2_NC_TRACE_SILK]  105.41,70.1 0 bottom

## Library data of the parts
3V3_LED 3V3_LED1-3V3_LED3 BYP BYP1-BYP3 EN EN1-EN3 MEAS MEAS1-MEAS3 VIN_LED VIN_LED1-VIN_LED3 = SparkFun-Jumpers
BT1-BT4 = SparkFun-Batteries; PROD_ID: BATT-14267
C1 C4 C6 C10 C14 C17 C20 C23 = SparkFun-Capacitors; PROD_ID: CAP-00810
C2 C8 C15 C21 = SparkFun-Capacitors; PROD_ID: CAP-00811
C3 C7 C11-C13 C18 C19 C24 = SparkFun-Capacitors; PROD_ID: CAP-07822
C5 C9 C16 C22 = SparkFun-Capacitors; PROD_ID: CAP-00868
D1 D9 D15 D21 = SparkFun-DiscreteSemi; PROD_ID: DIO-11284
D2 D3 D10 D11 D16 D17 D22 D23 = SparkFun-LED; PROD_ID: DIO-00819
D4 D12 D18 D24 = SparkFun-DiscreteSemi; PROD_ID: DIO-15271
D5 D6 D13 D19 = SparkFun-DiscreteSemi; PROD_ID: DIO-14072
D7 D8 D14 D20 = SparkFun-DiscreteSemi; PROD_ID: DIO-11623
E$1-E$4 FD1-FD16 LOGO1-LOGO32 = SparkFun-Aesthetics
E$5 E$6 = SparkFun-Retired
F1-F4 = SparkFun-Fuses; PROD_ID: RES-14313
H1-H4 H6-H11 H13-H18 H20-H25 H27 H28 = SparkFun-Hardware
H5 H12 H19 H26 = SparkFun-Hardware; PROD_ID: HW-14899
J1 J5 J49 J73 = SparkFun-Connectors; PROD_ID: CONN-14122
J2 J3 J7 J11 J13 J16 J22 J29 J36 J42 J44 J45 J50 J53 J60 J66 J68 J69 J74 J77 J84 J90 J92 J93 TP1-TP12 = SparkFun-Connectors
J4 J28 J52 J76 = SparkFun-Connectors; PROD_ID: CONN-09520; SF_ID: PRT-09011
J6 J27 J51 J75 = SparkFun-MicroMod; PROD_ID: CONN-14877
J8 J21 J37 J40 J61 J64 J85 J88 = SparkFun-Connectors; PROD_ID: CONN-08511
J9 J41 J65 J89 = SparkFun-Connectors; PROD_ID: CONN-09696
J10 J46 J70 J94 = SparkFun-Connectors; PROD_ID: CONN-15262
J12 J43 J67 J91 = SparkFun-Connectors; PROD_ID: CONN-15197
J14 J17 J24 J25 J30 J32 J38 J39 J54 J56 J62 J63 J78 J80 J86 J87 = SparkFun-Connectors; PROD_ID: CONN-10204; SF_ID: PRT-11543
J15 J18 J23 J26 J31 J33 J47 J48 J55 J57 J71 J72 J79 J81 J95 J96 = SparkFun-Connectors; PROD_ID: CONN-08438
J19 J20 J34 J35 J58 J59 J82 J83 = SparkFun-Connectors; PROD_ID: CONN-13694
R1 R4 R8 R11 R15 R16 R19 R23 R24 R27 R31 R32 = SparkFun-Resistors; PROD_ID: RES-07856
R2 R3 R6 R7 R17 R18 R25 R26 = SparkFun-Resistors; PROD_ID: RES-12083
R5 R14 R22 R30 = SparkFun-Resistors; PROD_ID: RES-07828
R9 R12 R20 R28 = SparkFun-Resistors; PROD_ID: RES-00824
R10 R13 R21 R29 = SparkFun-Resistors; PROD_ID: RES-09383
S1-S8 = SparkFun-Switches; PROD_ID: SWCH-14139
U1-U3 U5 = SparkFun-IC-Power; PROD_ID: VREG-14094
U$1 U$2 U$4 U$6-U$19 U$169-U$185 U$314-U$330 U$459-U$475 = ana
U$3 U$5 U$27 U$37-U$47 U$49 U$51 U$58 U$60 U$61 U$70 U$89 U$159-U$168 U$186-U$188 U$197-U$200 U$206 U$268-U$270 U$304-U$313 U$331-U$333 U$342-U$345 U$351 U$413-U$415 U$449-U$458 U$476-U$478 U$487-U$490 U$496 U$558-U$560 = power
U$20 U$36 U$53 U$54 U$56 U$81 U$84 U$147 U$283-U$290 U$428-U$435 U$573-U$580 = alc
U$21-U$26 U$28-U$35 U$52 U$59 U$130 U$139 U$141-U$143 U$148-U$158 U$189 U$207 U$267 U$271 U$274-U$277 U$292-U$303 U$334 U$352 U$412 U$416 U$419-U$422 U$437-U$448 U$479 U$497 U$557 U$561 U$564-U$567 = headtop
U$48 U$50 U$146 U$280-U$282 U$425-U$427 U$570-U$572 = output
U$55 U$74 U$291 U$436 = buzzard_labels (9)
U$57 U$62-U$69 U$71-U$73 U$190-U$196 U$201-U$205 U$335-U$341 U$346-U$350 U$480-U$486 U$491-U$495 = headers_dup
U$75-U$80 U$208-U$213 U$353-U$358 U$498-U$503 = fl1
U$82 U$83 U$85-U$87 U$90-U$97 U$110 U$137 U$138 U$214-U$226 U$238 U$264 U$265 U$359-U$371 U$383 U$409 U$410 U$504-U$516 U$528 U$554 U$555 = fl2
U$88 U$100-U$109 U$125-U$129 U$131-U$134 U$228-U$237 U$253-U$261 U$266 U$373-U$382 U$398-U$406 U$411 U$518-U$527 U$543-U$551 U$556 = fl3
U$98 U$111-U$124 U$135 U$136 U$227 U$239-U$252 U$262 U$263 U$372 U$384-U$397 U$407 U$408 U$517 U$529-U$542 U$552 U$553 = fl4
U$99 U$272 U$417 U$562 = D1
U$140 U$144 U$273 U$278 U$418 U$423 U$563 U$568 = SparkFun-MicroMod
U$145 U$279 U$424 U$569 = D1_again